# Altium PCB 数传模块.PcbDoc
Units mil, origin at the board's own origin, x right, y up, seen from the top; angles counter-clockwise.
Board outline 1880 x 1365 mil, 2 copper layers (Top Layer, Bottom Layer); 51 components, 52 nets, 224 pads, 196 vias.
Unrouted connection lines stored in the file: 58.
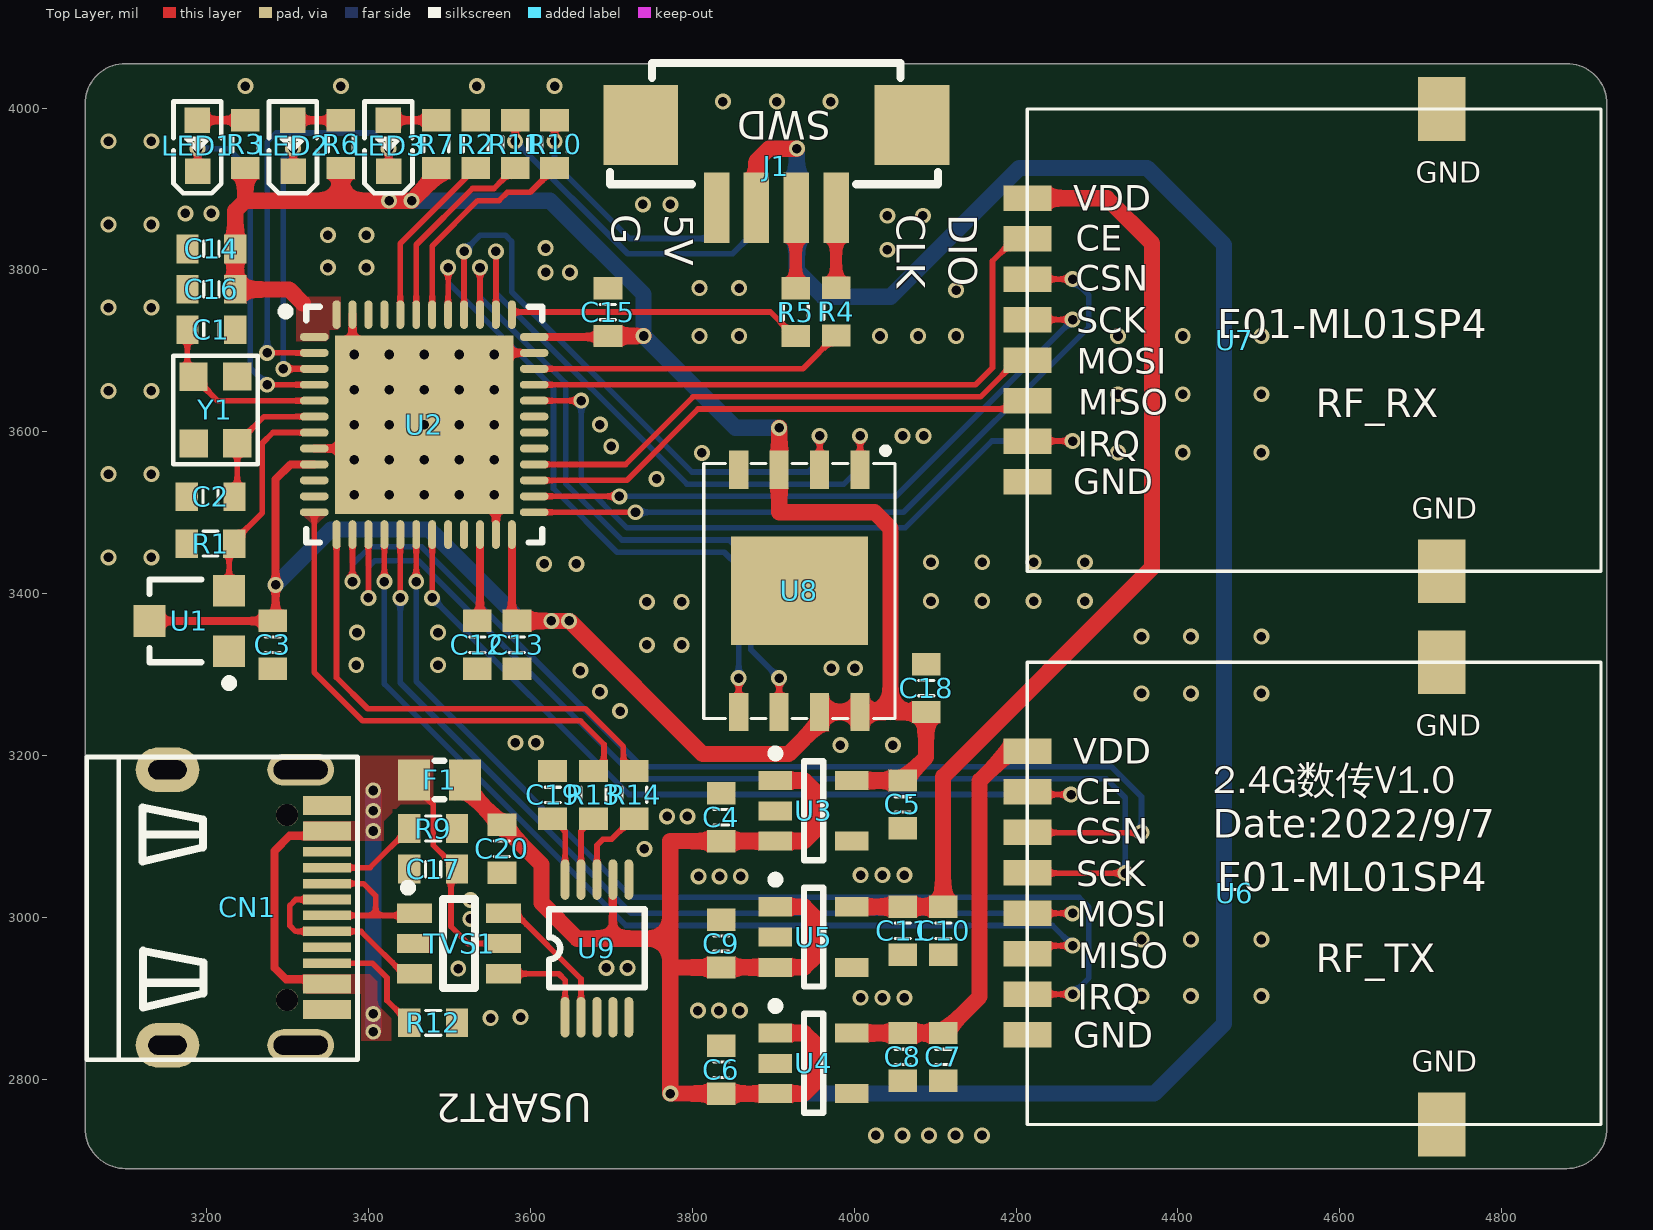
[diagram p0: Top Layer view]
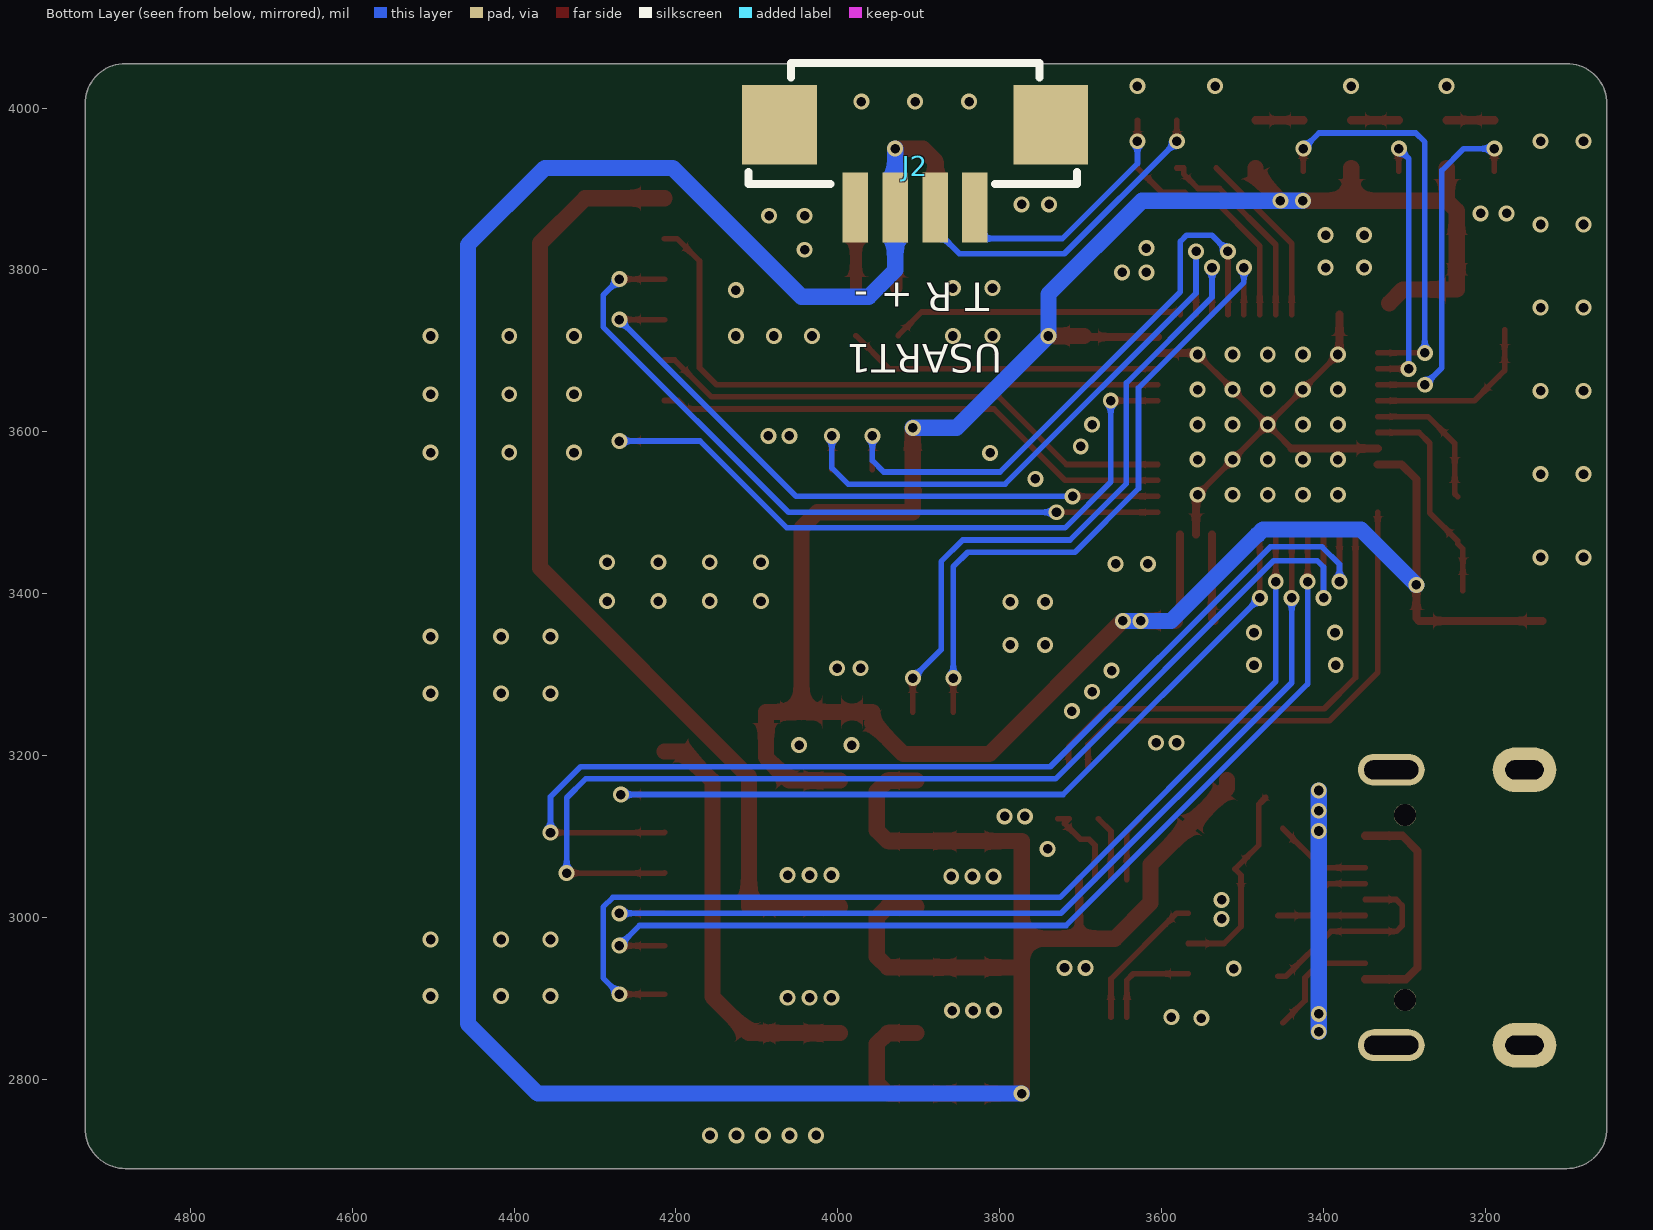
[diagram p1: Bottom Layer view, seen from below]
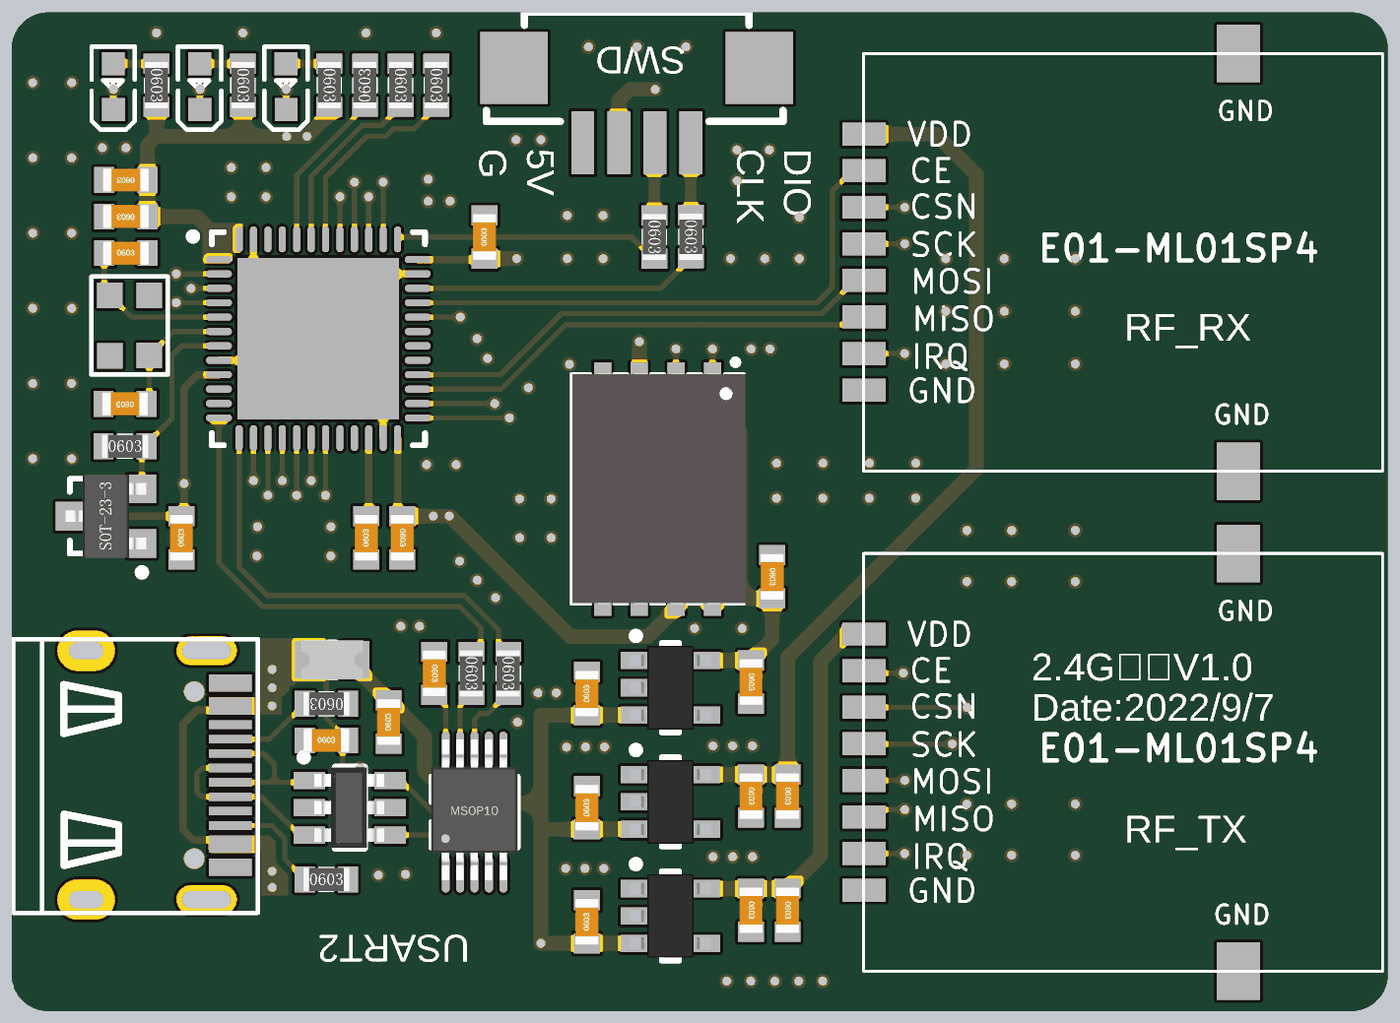
[diagram p2: 3D render of the assembled board from above, using the file's embedded part models]

## Layer stack, top to bottom
Top Solder: solder mask 0.4, Solder Resist, Dk 3.5
Top Layer: signal copper 1.4
Dielectric 1: dielectric 12.6, FR-4, Dk 4.8
Bottom Layer: signal copper 1.4
Bottom Solder: solder mask 0.4, Solder Resist, Dk 3.5

## Board outline
3050,2740 3050,4005 cw(c3100,4005) 3100,4055 4880,4055 cw(c4880,4005) 4930,4005 4930,2740 cw(c4880,2740) 4880,2690 3100,2690 cw(c3100,2740)

## Design rules (kind name [scope] priority, off if disabled: settings)
Clearance [All] p1: gap=8 ignorepadtopadclearanceinfootprint=TRUE except(0: Arc-Hole Track-Hole SMDPad-Hole THPad-Hole Via-Hole Fill-Hole Poly-Hole Region-Hole Text-Hole; 6: Arc-Via Track-Via; 7: SMDPad-Fill SMDPad-Poly SMDPad-Region)
PlaneConnect [All] p1: planeconnectstyle=Direct reliefexpansion=20 reliefentries=4 reliefconductorwidth=10 reliefairgap=10
PolygonConnect [All] p1: connectstyle=Direct reliefconductorwidth=10 reliefentries=4 polygonreliefangle="90 Angle" airgapwidth=10
RoutingVias [All] p1: holewidth=11.81 width=19.68 viastyle="Through Hole" minholewidth=11.81 minwidth=19.68 maxholewidth=30590.55 maxwidth=34960.63
SolderMaskExpansion [All] p1: expansion=4
Width [All] p1: maxlimit=999 minlimit=7 preferedwidth=7
29 further rules are at their usual default settings.

## Components (designator, comment, footprint, x,y, rotation, side; value= is the part's Value field where it differs from the comment)
C1 "12pF" 0603-C 3206,3726 r270 top
C2 "12pF" 0603-C 3205,3520 r90 top
C3 "100nF" 0603-C 3282.03,3337 r0 top
C4 "1uF" 0603-C 3836,3124 r0 top
C5 "1uF" 0603-C 4060,3139.8 r180 top
C6 "1uF" 0603-C 3836,2812.13 r0 top
C7 "1uF" 0603-C 4110,2827.87 r180 top
C8 "100nF" 0603-C 4060,2827.87 r180 top
C9 "1uF" 0603-C 3836,2968 r0 top
C10 "1uF" 0603-C 4110,2983.84 r180 top
C11 "100nF" 0603-C 4060,2983.84 r180 top
C12 "4.7uF" 0603-C 3534.58,3337 r0 top
C13 "100nF" 0603-C 3583.58,3337 r180 top
C14 "100nF" 0603-C 3206,3826 r90 top
C15 "100nF" 0603-C 3696,3748 r0 top
C16 "100nF" 0603-C 3206,3776 r90 top
C17 "100nF" 0603-C 3480,3060 r270 top
C18 "100nF" 0603-C 4089,3283.53 r180 top
C19 "100nF" 0603-C 3627.5,3151.53 r180 top
C20 "100nF" 0603-C 3565,3085 r0 top
CN1 "Type-c" "Type-c 16pin" 3240,3002.5 r270 top locked
F1 "12V 1A" 0805-FUSE 3487.87,3170 r270 top
J1 "1.25-4PWT" H1.25-4P 3904,3928 r180 top
J2 "1.25-4PWT" H1.25-4P 3904.61,3928.18 r0 bottom
LED1 "LED" LED-0603 3189.04,3953.47 r90 top
LED2 "LED" LED-0603 3307.02,3953.47 r90 top
LED3 "LED" LED-0603 3425,3953.47 r90 top
R1 "10K" 0603-R 3205,3462 r90 top
R2 "10K" 0603-R 3532.67,3955.47 r180 top
R3 "10K" 0603-R 3248,3955.47 r0 top
R4 "470R" 0603-R 3977.82,3748.47 r0 top
R5 "470R" 0603-R 3928,3748 r0 top
R6 "10K" 0603-R 3366,3955.47 r0 top
R7 "10K" 0603-R 3484,3955.47 r0 top
R9 "5.1K" 0603-R 3480,3110 r270 top
R10 "470R" 0603-R 3630,3955.47 r0 top
R11 "470R" 0603-R 3581.33,3955.47 r0 top
R12 "5.1K" 0603-R 3480,2870 r90 top
R13 "47R" 0603-R 3678,3151.53 r0 top
R14 "47R" 0603-R 3728.5,3151.53 r0 top
TVS1 "USBLC6-2SC6" USBLC6-2 3512,2968 r180 top
U1 "MAX809S" MAX809S 3183,3364 r90 top
U2 "STM32F401CDU6" STM32F401CDU6 3469,3609 r0 top locked
U3 "XC6228D332VR-G" XC6228D332VR-G 3950,3131.93 r0 top locked
U4 "XC6228D332VR-G" XC6228D332VR-G 3950,2820 r0 top locked
U5 "XC6228D332VR-G" XC6228D332VR-G 3950,2975.96 r0 top locked
U6 "E01-ML01SP4" PE01-ML01SP4 4470,3030 r0 top locked
U7 "E01-ML01SP4" PE01-ML01SP4 4470,3713.39 r0 top locked
U8 "W25Q256" W25Q256 3932.46,3403.62 r180 top locked
U9 "CH340E" CH340E 3684,2965 r0 top
Y1 "12MHZ" 3225 3210,3628 r270 top

## Footprints (in the part's own frame and the unit in brackets; to place one, negate y for a bottom-side part, rotate by r counter-clockwise, add the part's x,y. Pads: shape width x height; smd on the part's side, far side on the other; paste and mask are expansions set on the pad)
0603-C [mm]
  rect 0.9x0.7 smd: 1(0,0.75) 2(0,-0.75)
  silkscreen extent -0.24,-0.24 0.24,0.24, body extent -0.41,-0.8 0.41,0.8, height 0.84
0603-R [mm]
  rect 0.9x0.7 smd: 1(0,0.75) 2(0,-0.75)
  silkscreen extent -0.39,-0.24 0.39,0.24, body extent -0.4,-0.8 0.4,0.8, height 0.45
0805-FUSE [mm]
  rect 1.3x1 smd: 1(0,0.8) 2(0,-0.8)
  silkscreen extent -0.6,-0.15 0.6,0.15, body extent -0.68,-1.07 0.67,1.08, height 0.66
3225 [mil]
  rect 35x35 smd: 1(-40.24,-25.97) 2(42.36,-25.67) 3(42.16,28.03) 4(-40.44,28.03)
  silkscreen extent -66,-51 68,53, body extent -63,-47 63,51, height 24
CH340E [mil]
  oval 11x50 smd: 1(-41,-88) 2(-21.32,-88) 3(-1.63,-88) 4(18.06,-88) 5(37.74,-88) 6(37.74,82) 7(18.06,82) 8(-1.63,82) 9(-21.32,82) 10(-41,82)
  silkscreen extent -61,-51 57,45, body extent -61,-96 57,96, height 37
H1.25-4P [mm]
  rect 2.35x2.5 smd: 0(-4.255,-1.3) 0(4.255,-1.3)
  rect 0.8x2.2 smd: 1(-1.875,1.3) 2(-0.625,1.3) 3(0.625,1.3) 4(1.875,1.3)
  silkscreen extent -5.07,-3.24 5.22,0.56
LED-0603 [mm]
  rect 0.8x0.8 smd: 1(-0.799,-0.003) 2(0.799,0.004)
  silkscreen extent -1.49,-0.75 1.39,0.76
MAX809S [mm]
  rect 1x1 smd: 1(-0.889,-1.143) 2(1.011,-1.143) 3(0.061,1.357)
  silkscreen extent -2.01,-1.27 1.36,1.36, body extent -1.39,-1.29 1.51,1.51, height 1.2
PE01-ML01SP4 [mm] "18mm*14.5mm*2.4mm-S"
  rect 1.5x0.8 smd: 1(-6.497,4.453) 2(-6.497,3.183) 3(-6.497,1.913) 4(-6.497,0.643) 5(-6.497,-0.627) 6(-6.497,-1.897) 7(-6.497,-3.167) 8(-6.497,-4.437)
  rect 1.5x2 smd: 9(6.497,-7.25) 10(6.497,7.25)
  silkscreen extent -6.5,-7.25 11.5,7.25
STM32F401CDU6 [mm] "QFN, 48-Leads, Body 7.1x7.1mm, Pitch 0.5mm, Thermal Pad 5.6x5.6mm, IPC Medium Density"
  oval 0.9x0.25 smd: 1(-3.45,2.75) 2(-3.45,2.25) 3(-3.45,1.75) 4(-3.45,1.25) 5(-3.45,0.75) 6(-3.45,0.25) 7(-3.45,-0.25) 8(-3.45,-0.75) 9(-3.45,-1.25) 10(-3.45,-1.75) 11(-3.45,-2.25) 12(-3.45,-2.75) 25(3.45,-2.75) 26(3.45,-2.25) 27(3.45,-1.75) 28(3.45,-1.25) 29(3.45,-0.75) 30(3.45,-0.25) 31(3.45,0.25) 32(3.45,0.75) 33(3.45,1.25) 34(3.45,1.75) 35(3.45,2.25) 36(3.45,2.75)
  oval 0.25x0.9 smd: 13(-2.75,-3.45) 14(-2.25,-3.45) 15(-1.75,-3.45) 16(-1.25,-3.45) 17(-0.75,-3.45) 18(-0.25,-3.45) 19(0.25,-3.45) 20(0.75,-3.45) 21(1.25,-3.45) 22(1.75,-3.45) 23(2.25,-3.45) 24(2.75,-3.45) 37(2.75,3.45) 38(2.25,3.45) 39(1.75,3.45) 40(1.25,3.45) 41(0.75,3.45) 42(0.25,3.45) 43(-0.25,3.45) 44(-0.75,3.45) 45(-1.25,3.45) 46(-1.75,3.45) 47(-2.25,3.45) 48(-2.75,3.45)
  rect 5.6x5.6 smd: 49(0,0)
  silkscreen extent -4.47,-3.7 3.7,3.7, body extent -3.55,-3.55 3.55,3.55, height 0.6
"Type-c 16pin" [mm]
  oval 1.4x2 hole 0.6 slot 1.2 at 90 deg: 0(-4.574,-2.239) 0(4.066,-2.239)
  oval 1x2.1 hole 0.6 slot 1.7 at 90 deg: 0(-4.574,1.941) 0(4.066,1.941)
  rect 0.3x1.5 smd: A1(-3.604,2.761) A4(-2.804,2.761) A5(-1.504,2.761) A6(-0.504,2.761) A7(-0.004,2.761) A8(0.996,2.761) A9(2.296,2.761) A12(3.096,2.761) B1(2.796,2.761) B4(1.996,2.761) B5(1.496,2.761) B6(0.496,2.761) B7(-1.004,2.761) B8(-2.004,2.761) B9(-2.504,2.761) B12(-3.304,2.761)
  round 0.7 hole 0.7: D(-3.154,1.511) D(2.646,1.511)
  silkscreen extent -4.97,-4.77 4.53,3.72
USBLC6-2 [mm]
  rect 1.1x0.6 smd: 1(1.4,-0.95) 2(1.4,0) 3(1.4,0.95) 4(-1.4,0.95) 5(-1.4,0) 6(-1.4,-0.95)
  silkscreen extent -0.5,-1.87 1.72,1.4, body extent -1.19,-1.4 1.24,1.4, height 1.09
W25Q256 [mm]
  rect 0.6x1.2 smd: 1(-1.905,-3.8) 2(-0.635,-3.799) 3(0.635,-3.799) 4(1.905,-3.8) 5(1.905,3.8) 6(0.635,3.8) 7(-0.635,3.8) 8(-1.905,3.8)
  rect 4.3x3.4 smd: 9(0,0)
  silkscreen extent -3,-4.5 3,4, body extent -3.05,-4.01 2.95,3.99, height 0.81
XC6228D332VR-G [mm]
  rect 1.05x0.6 smd: 1(-1.2,0.95) 2(-1.2,0) 3(-1.2,-0.95) 4(1.2,-0.95) 5(1.2,0.95)
  silkscreen extent -1.32,-1.55 0.3,1.92, body extent -1.4,-1.45 1.4,1.45, height 1.2

## Part data
C1 C2 C3 C4 C5 C6 C7 C8 C9 C10 C11 C12 C13 C14 C15 C16 C17 C18 C19 C20: library part C, "贴片电容", BOM名称=无, 联系卖家，免费查找封装=唯一出售店
CN1: "U262-161N-4BVC11"
F1: library part FUSE, "12V,自恢复保险丝"
J1 J2: library part H1.25-4P, BOM_Manufacturer=FG(富?, JLCPCB Part Class="Extended Part", BOM_Manufacturer Part=1.25-4PWT, BOM_Supplier=LCSC, BOM_Supplier Part=C2763632, Contributor=LCSC, spicePre=C, spiceSymbolName=1.25-4PWT
LED1 LED2 LED3: BOM_JLCPCB Part Class="Extended Part", BOM_Manufacturer="Wuxi ARK Tech Elec", BOM_Manufacturer Part=D-G060306G1-KS2, BOM_Supplier=LCSC, BOM_Supplier Part=C118334, Contributor=LCSC, spicePre=L, spiceSymbolName=D-G060306G1-KS2
R1 R2 R3 R4 R5 R6 R7 R9 R10 R11 R12 R13 R14: library part R, "贴片电阻", BOM名称=Ì, 联系卖家，免费查找封装=唯一出售店
TVS1: "USBLC6-2SC6_C2687116", BOM_JLCPCB Part Class="Extended Part", BOM_Manufacturer=UMW(友台, BOM_Manufacturer Part=USBLC6-2SC6, BOM_Supplier=LCSC, BOM_Supplier Part=C2687116, Contributor=LCSC, spicePre=D, spiceSymbolName=USBLC6-2SC6_C2687116
U1: BOM_JLCPCB Part Class="Extended Part", BOM_Manufacturer="Youtai Semiconductor Co., Ltd.", BOM_Manufacturer Part=MAX809S, BOM_Supplier=LCSC, BOM_Supplier Part=C347371, Contributor=LCSC, spicePre=U, spiceSymbolName=MAX809S
U2: "ARM Cortex-M4 32-bit MCU+FPU, 105 DMIPS, 256 kB Flash, 64 kB Internal RAM, 36 I/Os, 48-pin UFQFPN, -40 to 85 degC, Tray", I/Os (High Current)=36, Manufacturer=STMicroelectronics, Operating Frequency(F) (Processor speed) (MHz)=84, PartNumber=STM32F401CCU6, Supplier Part Number 1=19X6217, Supply Voltage(Vcc) max (V)=3.6, Supply Voltage(Vcc) min (V)=1.8, ComponentLink1Description="Manufacturer URL", ComponentLink1URL=http://www.st.com/web/en/home.html, ComponentLink2Description=Datasheet, ComponentLink2URL=http://www.st.com/st-web-ui/static/active/en/resource/technical/document/data_brief/DM00071938.pdf, ComponentLink3Description="Package Specification", ComponentLink3URL=http://www.st.com/st-web-ui/static/active/en/resource/technical/document/data_brief/DM00071938.pdf, Core="ARM Cortex-M4", DatasheetVersion="Rev. 1", FLASH Size (Prog) (kB)=256, Internal RAM Size (kB)=64, Mounting Technology="Surface Mount", PackageDescription="48-Pin Ultra Thin Fine Pitch Quad Flat No-Lead, 7 x 7 x 0.6 mm Body, 0.5 mm Pitch, Exposed Pad", PackageReference=UFQFPN48, PackageVersion="Rev. 1, 04/2013", Packing=Tray, Supplier 1=Newark, Supplier 2=Mouser, Supplier Part Number 2=511-STM32F401CCU6
U3 U4 U5: "输出类型：固定 输出极性：正 输出通道数：1 最大输入电压：5.5V 输出电压：3.3V 压差：305mV@(300mA) 输出电流：300mA 电源纹波抑制比(PSRR)：80dB@(1kHz) 3.3V固定输出，Iout=300mA，Vin=5.5V(Max)"
U6 U7: "贴片NREF24L01"
U8: BOM_JLCPCB Part Class="Extended Part", BOM_Manufacturer=WINBOND(华?, BOM_Manufacturer Part=W25Q256JVEIQ, BOM_Supplier=LCSC, BOM_Supplier Part=C2682312, Contributor=LCSC, spicePre=U, spiceSymbolName=W25Q256JVEIQ
U9: "USB to TTL Serial / UART"
Y1: library part Y, "无源晶振"

## Via types
v1: diameter 19.68, hole 11.81, Top Layer to Bottom Layer, tented both sides, 171 vias
v2: diameter 19.68, hole 11.81, Top Layer to Bottom Layer, tented bottom, 25 vias

## Nets (pads, with @x,y where several pads share a name; then routed paths per layer and width w, separated by ;. In a path a pad name is that pad's centre, name@x,y a point inside that pad or via, vN(x,y) a via of type N, cw(c..) or ccw(c..) an arc to the next point about the centre after c; other vN are vias at no path point)
BOOT0: R2.1 U2.44 | length 219.7
  Top Layer w7: U2.44 3439.47,3832.75 R2.1
DM: CN1.A7 CN1.B7 TVS1.1 | length 198.7
  Top Layer w7: CN1.A7 3409,3002.66 ; CN1.B7 3393.97,3042.03 3409,3027 3409,3002.66 ; TVS1.1@3456.44,3002.4 3456.18,3002.66 3409,3002.66
DP: CN1.A6 CN1.B6 TVS1.3 | length 253
  Top Layer w7: CN1.A6 3310.34,3022.34 3303,3015 3303,2990 3310.03,2982.97 CN1.B6 3391.03,2982.97 3446.4,2927.6 TVS1.3@3456.44,2927.6
GND: C1.1 C2.1 C3.2 C4.1 C5.1 C6.1 C7.1 C8.1 C9.1 C10.1 C11.1 C12.2 C13.1 C14.1 C15.1 C16.1 C17.2 C18.2 C19.2 C20.2 CN1.0 CN1.A1 CN1.A12 CN1.B1 CN1.B12 J1.0 J1.4 J2.0 J2.4 R1.1 R2.2 R9.1 R12.2 TVS1.2 U1.1 U2.8 U2.23 U2.35 U2.47 U2.49 U3.2 U4.2 U5.2 U6.8 U6.9 U6.10 U7.8 U7.9 U7.10 U8.4 U8.9 U9.3 Y1.2 Y1.4 | length 665.6
  Top Layer w7: U2.49@3380.42,3697.58 v2(3382.39,3695.61) v2(3425.69,3652.31) v2(3469,3609) ; U2.49@3439.47,3579.47 v2(3469,3609) ; U2.49@3557.58,3520.42 v2(3555.61,3522.39) v2(3512.31,3565.69) v2(3469,3609) ; U2.49@3557.58,3697.58 v2(3512.31,3652.31) v2(3469,3609)
  Top Layer w10: U2.8 U2.49@3439.47,3579.47 ; U2.49@3380.42,3697.58 U2.47 ; U2.23 U2.49@3557.58,3520.42 ; U2.49@3557.58,3697.58 U2.35
  other v1: 4027,2731 4059.75,2731 4092.5,2731 4125.25,2731 4158,2731 3551,2875.89 3588,2877 3807,2885 3833,2885 3859,2885 4008,2901 4035,2901 4062,2901 4355,2903 4416,2903 4503,2903 3511,2937 3694,2938 3720.07,2938 4355,2973 4416,2973 4503,2973 3526,2998.53 3526,3022 3808,3051 3834,3051 3860,3051 4008,3052.47 4035,3052.47 4062,3052.47 3741,3085 3769,3125 3794,3125 3983,3213 4048,3213 3581.6,3216 3607,3216 3711,3255 4355,3277 4416,3277 4503,3277 3686,3279 3662,3305 3972,3308 4001,3308 3385,3312 3486,3312 3744,3337 3787,3337 4355,3347 4416,3347 4503,3347 3386,3352 3486,3352 3744,3390 3787,3390 4095,3391 4158.33,3391 4221.67,3391 4285,3391 3617,3437 3657,3437 4095,3439 4158.33,3439 4221.67,3439 4285,3439 3079,3445 3132,3445 3756,3542 3079,3547.8 3132,3547.8 3812,3574 4326,3574.47 4406,3574.47 4503,3574.47 3700,3582 4060,3595 4086,3595 3686,3609 4326,3646.47 4406,3646.47 4503,3646.47 3079,3650.6 3132,3650.6 3809,3718.47 3858,3718.47 4032,3718.47 4079,3718.47 4126,3718.47 4326,3718.47 4406,3718.47 4503,3718.47 3079,3753.4 3132,3753.4 4126,3775 3809,3777.53 3858,3777.53 3619,3797 3649,3797 3350,3803 3397.45,3803 4041,3825 3619,3827 3350,3843 3397.45,3843 3079,3856.2 3132,3856.2 4041,3867 4085,3867 3174,3870 3206,3870 3739,3881 3773,3881 3079,3959 3079,3959 3132,3959 3838,4008 3904.5,4008 3971,4008 3248,4027 3366,4027 3534,4027 3630,4027
  other v2: 3382.39,3522.39 3425.69,3522.39 3469,3522.39 3512.31,3522.39 3382.39,3565.69 3425.69,3565.69 3469,3565.69 3555.61,3565.69 3382.39,3609 3425.69,3609 3512.31,3609 3555.61,3609 3382.39,3652.31 3469,3652.31 3555.61,3652.31 3425.69,3695.61 3469,3695.61 3512.31,3695.61 3555.61,3695.61
LED1: LED1.1 U2.4 | length 435.4
  Top Layer w7: LED1.1 v1(3189.18,3949.82) ; v1(3275,3658.21) U2.4
  Bottom Layer w7: v1(3189.18,3949.82) 3227.18,3949.82 3254,3923 3254,3679.21 v1(3275,3658.21)
LED2: LED2.1 U2.3 | length 343
  Top Layer w7: v1(3295,3677.9) U2.3 ; LED2.1 v1(3307.16,3949.82)
  Bottom Layer w7: v1(3295,3677.9) 3295,3937.66 v1(3307.16,3949.82)
LED3: LED3.1 U2.2 | length 509.2
  Top Layer w7: v1(3275,3697.58) U2.2 ; LED3.1 v1(3425.14,3949.82)
  Bottom Layer w7: v1(3275,3697.58) 3275,3958 3286.16,3969.16 3405.79,3969.16 v1(3425.14,3949.82)
NetC19_1: C19.1 U9.10 | length 81.4
  Top Layer w7: C19.1 3643,3106.5 U9.10
NetCN1_A5: CN1.A5 R9.2 | length 121.8
  Top Layer w7: CN1.A5 3402.19,3061.71 R9.2
NetCN1_B5: CN1.B5 R12.1 | length 148.8
  Top Layer w7: CN1.B5 3405.18,2943.6 3423,2925.79 3423,2897.47 R12.1
NetJ1_1: J1.1 R4.1 | length 98.8
  Top Layer w15: R4.1 J1.1
NetJ1_2: J1.2 R5.1 | length 99.5
  Top Layer w15: R5.1 3928,3876.21 J1.2
NetJ2_1: J2.1 R10.1 | length 330.9
  Top Layer w7: v1(3630,3959) R10.1
  Bottom Layer w7: v1(3630,3959) 3630,3931.55 3722.76,3838.79 3830.79,3838.79 J2.1
NetJ2_2: J2.2 R11.1 | length 421.7
  Top Layer w7: v1(3581.33,3959) R11.1
  Bottom Layer w7: v1(3581.33,3959) 3720.33,3820 3850,3820 3880,3850 J2.2
NetLED1_2: LED1.2 R3.1 | length 59.1
  Top Layer w7: LED1.2 LED1.2@3188.95,3985
  Top Layer w10: LED1.2@3188.95,3985 R3.1
NetLED2_2: LED2.2 R6.1 | length 59.1
  Top Layer w7: R6.1@3365.95,3984.95 R6.1
  Top Layer w10: LED2.2 R6.1@3365.95,3984.95
NetLED3_2: LED3.2 R7.1 | length 59.2
  Top Layer w7: R7.1@3483.95,3984.95 R7.1
  Top Layer w10: LED3.2 R7.1@3483.95,3984.95
NetR13_2: R13.2 U9.9 | length 81.3
  Top Layer w7: U9.9 3662.69,3106.69 R13.2
NetR14_2: R14.2 U9.8 | length 113.4
  Top Layer w7: U9.8 3682.37,3089.37 3689.72,3096.72 3700.48,3096.72 3720.07,3116.31 3714.37,3122 R14.2
NRF24L01_RX_CE: U2.33 U7.2 | length 761.3
  Top Layer w7: U2.33 4150,3658.21 4171,3679.21 4171,3811 4198.7,3838.7 U7.2
NRF24L01_RX_IRQ: U2.32 U7.7 | length 889.4
  Top Layer w7: U2.32 v1(3663,3638.53) ; U7.7 v1(4270,3588.7)
  Bottom Layer w7: v1(3663,3638.53) 3663,3538 3719.61,3481.39 4062.99,3481.39 4170.3,3588.7 v1(4270,3588.7)
NRF24L01_TX_CE: U2.19 U6.2 | length 993.1
  Top Layer w7: v1(3478.84,3395) U2.19 ; U6.2@4242.9,3152 v1(4268,3152)
  Bottom Layer w7: v1(3478.84,3395) 3721.84,3152 v1(4268,3152)
NRF24L01_TX_IRQ: U2.18 U6.7 | length 1299.5
  Top Layer w7: v1(3459.16,3415) U2.18 ; U6.7 v1(4270,2905.32)
  Bottom Layer w7: v1(3459.16,3415) 3459.16,3291.7 3725.85,3025 4278,3025 4290,3013 4290,2925.32 v1(4270,2905.32)
NRST: R1.2 U1.2 U2.7 | length 268.8
  Top Layer w7: U1.2 3228,3455.47 R1.2 3234.53,3465.53 3269,3500 3269,3586 3282.16,3599.16 U2.7
OSC_IN: C1.2 U2.5 Y1.1 | length 222.3
  Top Layer w7: C1.2 3176.47,3675.8 Y1.1 3213.75,3638.53 U2.5
OSC_OUT: C2.2 U2.6 Y1.3 | length 176.1
  Top Layer w7: C2.2 3238.03,3523.5 Y1.3 3271.03,3618.84 U2.6
SPI1_CS: U2.14 U6.3 | length 1376.1
  Top Layer w7: v1(3380.42,3415) U2.14 ; U6.3 4214.53,3105 v1(4355,3105)
  Bottom Layer w7: v1(3380.42,3415) 3380.42,3436.42 3402,3458 3466,3458 3737.66,3186.34 4317.87,3186.34 4355,3149.21 v1(4355,3105)
SPI1_MISO: U2.16 U6.6 | length 1224.5
  Top Layer w7: v1(3419.79,3415) U2.16 ; U6.6@4214.21,2965.32 v1(4270,2965.32)
  Bottom Layer w7: v1(3419.79,3415) 3419.79,3288.64 3718.11,2990.32 4245,2990.32 v1(4270,2965.32)
SPI1_MOSI: U2.17 U6.5 | length 1187.3
  Top Layer w7: v1(3439.47,3395) U2.17 ; U6.5 v1(4270,3005.32)
  Bottom Layer w7: v1(3439.47,3395) 3439.47,3290.17 3724.32,3005.32 v1(4270,3005.32)
SPI1_SCK: U2.15 U6.4 | length 1389.7
  Top Layer w7: v1(3400.1,3395) U2.15 ; U6.4 4214.53,3055 v1(4335,3055)
  Bottom Layer w7: v1(3400.1,3395) 3400.1,3433.1 3408,3441 3461.61,3441 3731.27,3171.34 4311.66,3171.34 4335,3148 v1(4335,3055)
SPI2_CS: U2.25 U7.3 | length 903.1
  Top Layer w7: U2.25 v1(3730,3500.73) ; U7.3 v1(4270,3788.7)
  Bottom Layer w7: v1(3730,3500.73) 4061.12,3500.73 4290,3729.61 4290,3768.7 v1(4270,3788.7)
SPI2_MISO: U2.27 U7.6 | length 650.2
  Top Layer w7: U2.27 3719.1,3540.1 3807.21,3628.21 4186.81,3628.21 4197.3,3638.7 U7.6
SPI2_MOSI: U2.28 U7.5 | length 662.8
  Top Layer w7: U2.28 3717.57,3559.79 3801,3643.21 4156.21,3643.21 4201.7,3688.7 U7.5
SPI2_SCK: U2.26 U7.4 | length 811.4
  Top Layer w7: U2.26 v1(3710,3520.42) ; U7.4 v1(4270,3738.7)
  Bottom Layer w7: v1(3710,3520.42) 4051.72,3520.42 v1(4270,3738.7)
SPI3_CS: U2.38 U8.1 | length 767.1
  Top Layer w7: U2.38 v1(3557.58,3823) ; U8.1 v1(4007.46,3595.01)
  Bottom Layer w7: v1(3557.58,3823) 3557.58,3771.3 3793.46,3535.42 3987.42,3535.42 4007.46,3555.46 v1(4007.46,3595.01)
SPI3_MISO: U2.40 U8.2 | length 761.3
  Top Layer w7: U2.40 v1(3518.21,3823) ; U8.2 v1(3957.46,3595)
  Bottom Layer w7: v1(3518.21,3823) 3538.21,3843 3569,3843 3576.93,3835.07 3576.93,3773.17 3799.68,3550.42 3943.42,3550.42 3957.46,3564.46 v1(3957.46,3595)
SPI3_MOSI: U2.41 U8.5 | length 833.4
  Top Layer w7: U2.41 v1(3498.53,3803) ; U8.5 v1(3857.46,3295.8)
  Bottom Layer w7: v1(3498.53,3803) 3498.53,3784.47 3628.66,3654.34 3628.66,3529.92 3707.18,3451.39 3839.61,3451.39 3857.46,3433.54 v1(3857.46,3295.8)
SPI3_SCK: U2.39 U8.6 | length 837.8
  Top Layer w7: U2.39 v1(3537.9,3803) ; U8.6 v1(3907.46,3295.8)
  Bottom Layer w7: v1(3537.9,3803) 3537.9,3766.32 3643.66,3660.56 3643.66,3536.13 3713.4,3466.39 3845.82,3466.39 3872.46,3439.75 3872.46,3330.8 v1(3907.46,3295.8)
SWCLK: R5.2 U2.37 | length 363.5
  Top Layer w7: U2.37 3577.27,3748 3896.55,3748 R5.2@3925.6,3718.94
SWDIO: R4.2 U2.34 | length 390
  Top Layer w7: U2.34 3936.77,3677.9 R4.2
UD+: TVS1.4 U9.1 | length 124.9
  Top Layer w7: TVS1.4 3635.19,2930.6 3643,2922.79 U9.1
UD-: TVS1.6 U9.2 | length 176.5
  Top Layer w7: TVS1.6 3581.6,3005.4 3662.69,2924.31 U9.2
USART1_RXD: R11.2 U2.43 | length 252.2
  Top Layer w7: U2.43 3459.16,3831.22 3528.6,3900.67 3555.15,3900.67 3573,3918.52 3573,3925.94 R11.2
USART1_TXD: R10.2 U2.42 | length 275.9
  Top Layer w7: U2.42 3478.84,3829.69 3534.81,3885.67 3561.36,3885.67 3571.69,3896 3600.05,3896 R10.2
USART2_RXD: R14.1 U2.13 | length 589.5
  Top Layer w7: U2.13 3360.73,3296.48 3399.21,3258 3668.21,3258 3715,3211.21 R14.1@3715,3188
USART2_TXD: R13.1 U2.12 | length 619.5
  Top Layer w7: U2.12 3333.17,3302.83 3393,3243 3662,3243 3691,3214 R13.1@3691,3187
VBUS: C17.1 CN1.A4 CN1.A9 CN1.B4 CN1.B9 F1.2 TVS1.5 | length 837.4
  Top Layer w7: F1.2@3471.71,3148.29 3480,3140 3480,3089.53 C17.1 3502,3052.47 3502,2989 3523,2968 TVS1.5
  Top Layer w10: CN1.B4 3298.08,2923.92 3284,2938 3284,3082.5 3302.59,3101.08 CN1.B9
  Bottom Layer w20: v1(3406,2859) v1(3406,2881) v1(3406,3107) v1(3406,3132) v1(3406,3157)
VCAP1: C12.1 U2.22 | length 108
  Top Layer w10: C12.1 3537.9,3369.84 U2.22
VCC-3.3V#1: C3.1 C5.2 C13.2 C14.2 C15.2 C16.2 C18.1 R3.2 R6.2 R7.2 U1.3 U2.1 U2.9 U2.24 U2.36 U2.48 U3.5 U8.3 U8.7 U8.8 | length 3478.6
  Top Layer w7: C15.2@3692.2,3717.27 C15.2@3694,3715.47 ; U8.7@3957.46,3240.46 U8.7
  Top Layer w10: U1.3 3281.91,3366.4 C3.1 3285.5,3370 v1(3285.5,3411) 3285.5,3541.5 3303.79,3559.79 U2.9 ; U2.24 3577.27,3372.84 C13.2 ; U2.36 C15.2@3692.2,3717.27
  Top Layer w20: R3.2 3248,3885.53 ; 3319,3759 3302,3776 C16.2 C14.2 3235.53,3873.06 3248,3885.53 ; R6.2 3366,3885.53 ; R7.2 3484,3916 v1(3453.53,3885.53) v1(3425.71,3885.53) 3366,3885.53 ; C13.2 v1(3626,3366.53) v1(3648,3366.53) 3648.47,3366.53 3813,3202 3919,3202 U8.7@3957.46,3240.46 ; C15.2 v1(3740,3718.47) ; v1(3907.46,3605) U8.3 3907.46,3500.73 4025.27,3500.73 4045,3481 4045,3254 ; U8.7 U8.8 4045,3254 ; U3.5 C5.2 ; C5.2@4059,3170.33 C5.2 ; 3248,3885.53 3366,3885.53 ; 4045,3254 C18.1 4089,3198.33 C5.2
  Bottom Layer w20: v1(3285.5,3411) 3354,3479.5 3474.91,3479.5 3481.41,3473 3482,3473 3588.47,3366.53 v1(3626,3366.53) v1(3648,3366.53) ; v1(3425.71,3885.53) v1(3453.53,3885.53) 3624.4,3885.53 3740,3769.93 v1(3740,3718.47) 3853.47,3605 v1(3907.46,3605)
VCC-3.3V#2: C7.2 C8.2 U4.5 U6.1 | length 517.2
  Top Layer w20: U4.5 C8.2 C7.2 4155,2902.4 4155,3169 4191.32,3205.32 U6.1
VCC-3.3V#3: C10.2 C11.2 U5.5 U7.1 | length 1216.1
  Top Layer w20: U5.5 C11.2 C10.2 4110,3174 4368,3432 4368,3833 4312.3,3888.7 U7.1
VCC-5.0V#1: C4.2 C6.2 C9.2 C20.1 F1.1 J1.3 J2.3 U3.1 U3.3 U4.1 U4.3 U5.1 U5.3 U9.7 | length 4210.7
  Top Layer w7: 3773,2938 3773.47,2938.47
  Top Layer w10: 3702.06,2971 3702.06,2974 U9.7
  Top Layer w20: F1.1 3519.37,3160.16 C20.1 3614,3065.53 3614,3018 3658,2974 3702.06,2974 3773,2974 ; 3773.47,2938.47 C9.2 ; C9.2@3836,2938.56 U5.3 3938.6,2938.56 3952,2951.96 3952,2999.96 3938.6,3013.37 U5.1 ; C4.2 3773,3094.47 3773,2974 ; C4.2 U3.3 3938.6,3094.53 3952,3107.93 3952,3155.93 3938.6,3169.33 U3.1 ; J1.3 3879.39,3934.39 3894.82,3949.82 v1(3929.21,3949.82) ; U4.1 3938.6,2857.4 3952,2844 3952,2796 3938.6,2782.6 U4.3 C6.2 v1(3773,2782.6) 3773,2938 3773,2974
  Bottom Layer w20: v1(3773,2782.6) 4370.6,2782.6 4457,2869 4457,3831 4362,3926 4204,3926 4045,3767 3962,3767 3929.21,3799.79 J2.3 v1(3929.21,3949.82)
pads on no net: CN1.A8 CN1.B8 CN1.D U2.10 U2.11 U2.20 U2.21 U2.29 U2.30 U2.31 U2.45 U2.46 U3.4 U4.4 U5.4 U9.4 U9.5 U9.6

## Polygon pours and split planes (outlines as drawn)
VCC-3.3V#1 on Top Layer "Top Layer-VCC-3.3V#1" (solid, pour order 12): 3365.95,3729.95 3365.95,3767 3311,3767 3311,3712 3348,3712
USART2_TXD on Top Layer "Top Layer-USART2_TXD" (solid, pour order 10): 3317,3499 3331,3485 3335.57,3485 3349.57,3499
VBUS on Top Layer "Top Layer-VBUS" (solid, pour order 8): 3411,2910.01 3411,2897 3428,2880 3428,2848 3391,2848 3391,2909.99
VBUS on Top Layer "Top Layer-VBUS 1" (solid, remove dead copper, pour order 6): 3319,2930.02 3411,2930.02 3411,2906.02 3319,2906.02
VBUS on Top Layer "Top Layer-VBUS 2" (solid, pour order 4): 3407,3107 3440,3140 3480,3140 3480,3200 3390,3200 3390,3107
VBUS on Top Layer "Top Layer-VBUS 3" (solid, remove dead copper, pour order 0): 3320,3119 3419,3119 3419,3095 3320,3095

## Silkscreen, mask and mechanical layers (free items; w line width, h text height)
Top Overlay:
  text "SWD" at 3971,4008 h60 r180
  text "G" at 3689,3869 h60 r270
  text "5V" at 3754.27,3869 h60 r270
  text "CLK" at 4041,3869 h60 r270
  text "DIO" at 4105.08,3869 h60 r270
  text "RF_RX" at 4570,3606.65 h60
  text "2.4G数传V1.0" at 4442.94,3142.04 h60
  text "Date:2022/9/7" at 4443,3086.95 h60
  text "RF_TX" at 4570,2920.65 h60
  text "USART2" at 3675.91,2794 h60 r180
Bottom Overlay:
  text "T R + -" at 3813,3795.66 h60 r180
  text "USART1" at 3797,3720 h60 r180
Mechanical 1:
  lines w10: 3050,2740 ccw(c3100,2740) 3100,2690 4880,2690 ccw(c4880,2740) 4930,2740 4930,4005 ccw(c4880,4005) 4880,4055 3100,4055 ccw(c3100,4005) 3050,4005 3050,3140 3050,2740

## Text inside footprints (layer, text, board x,y; h text height)
U6: Top Overlay "VDD" at 4270.47,3189.84 h31.5; Top Overlay "GND" at 4693.98,3224.57 h25.59; Top Overlay "CE" at 4273.62,3140.24 h31.5; Top Overlay "CSN" at 4273.62,3091.02 h31.5; Top Overlay "SCK" at 4274.41,3039.06 h31.5; Top Overlay "MOSI" at 4275.2,2988.66 h31.5; Top Overlay "MISO" at 4277.17,2937.48 h31.5; Top Overlay "IRQ" at 4276.38,2885.91 h31.5; Top Overlay "GND" at 4270.47,2839.45 h31.5; Top Overlay "GND" at 4688.98,2809.57 h25.59
U7: Top Overlay "VDD" at 4270.47,3873.23 h31.5; Top Overlay "GND" at 4693.98,3907.95 h25.59; Top Overlay "CE" at 4273.62,3823.62 h31.5; Top Overlay "CSN" at 4273.62,3774.41 h31.5; Top Overlay "SCK" at 4274.41,3722.44 h31.5; Top Overlay "MOSI" at 4275.2,3672.05 h31.5; Top Overlay "MISO" at 4277.17,3620.87 h31.5; Top Overlay "IRQ" at 4276.38,3569.29 h31.5; Top Overlay "GND" at 4270.47,3522.83 h31.5; Top Overlay "GND" at 4688.98,3492.95 h25.59